# Altium PCB PCB1.PcbDoc
Units mm, origin at the board's own origin, x right, y up, seen from the top; angles counter-clockwise.
Board outline 190 x 137 mm, 2 copper layers (Top Layer, Bottom Layer), stack 1.671 mm thick; 6 components, 4 nets, 17 pads, 0 vias.
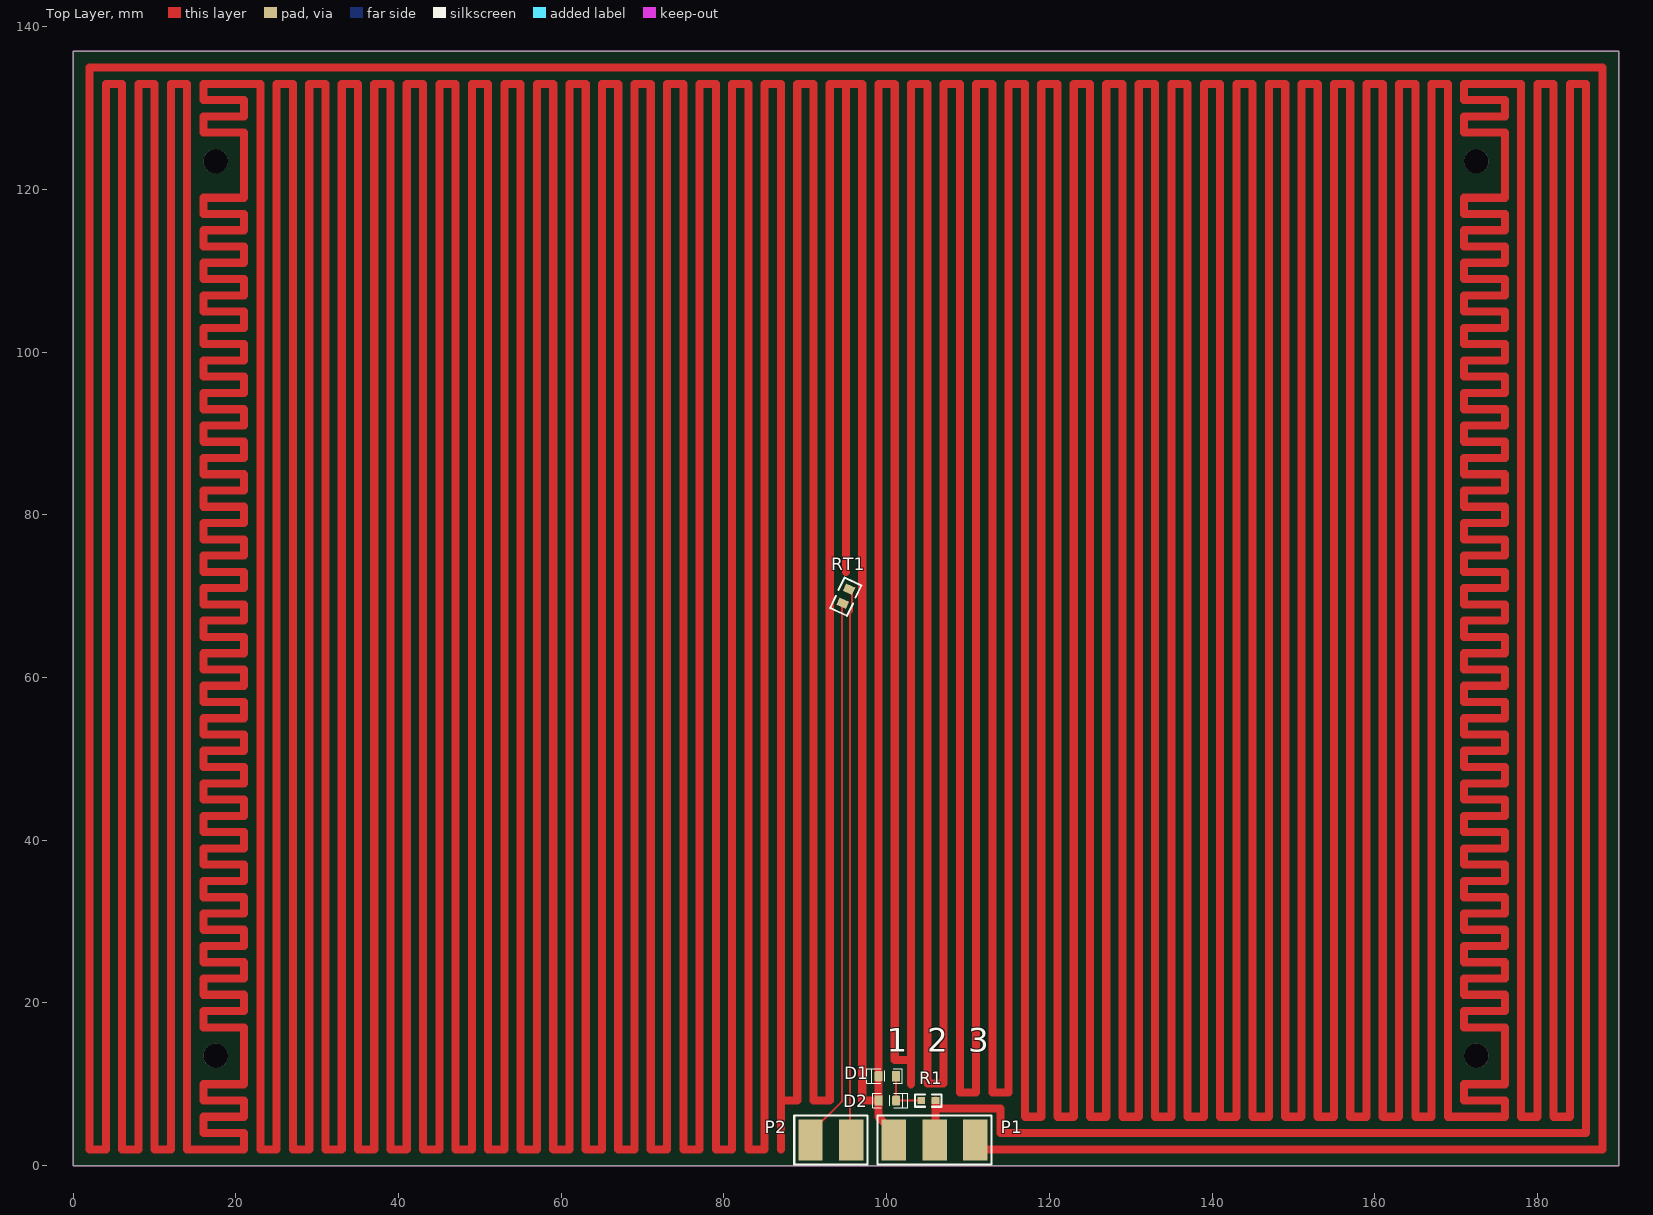
[diagram p0: Top Layer view]
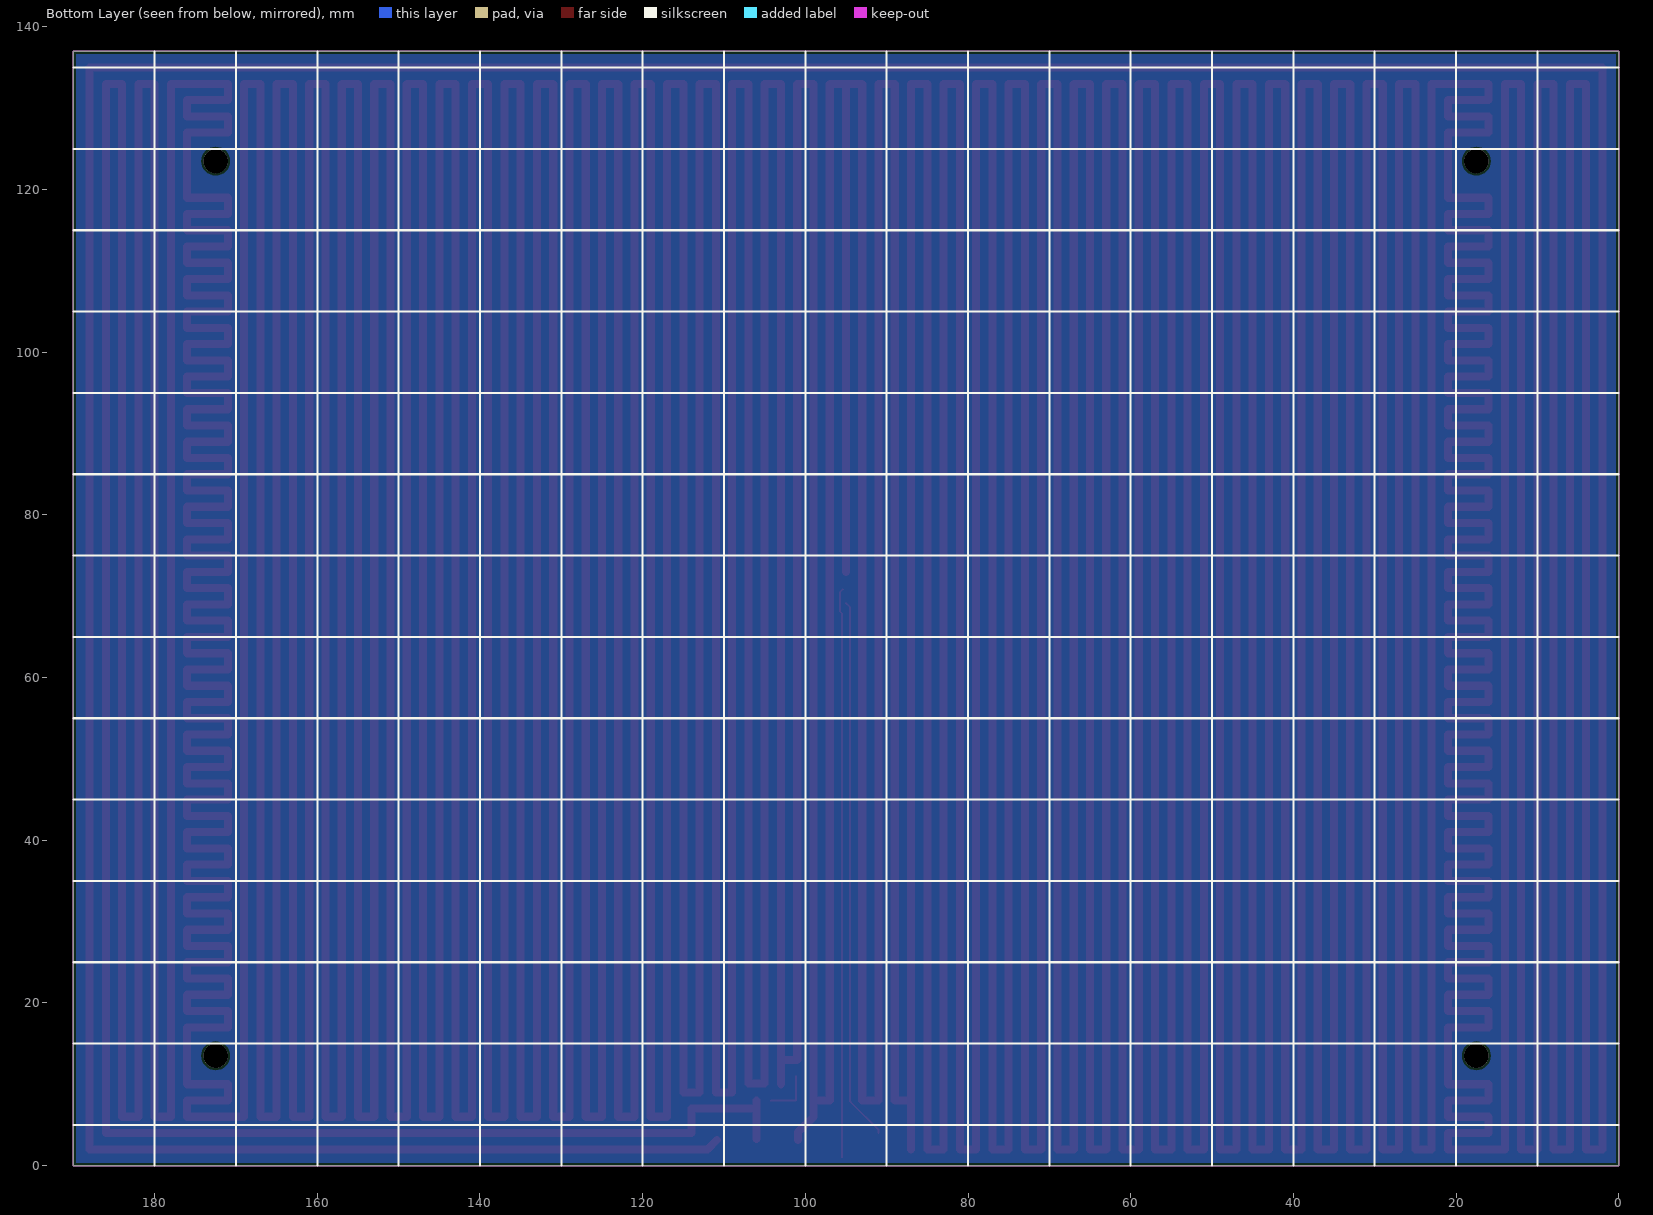
[diagram p1: Bottom Layer view, seen from below]
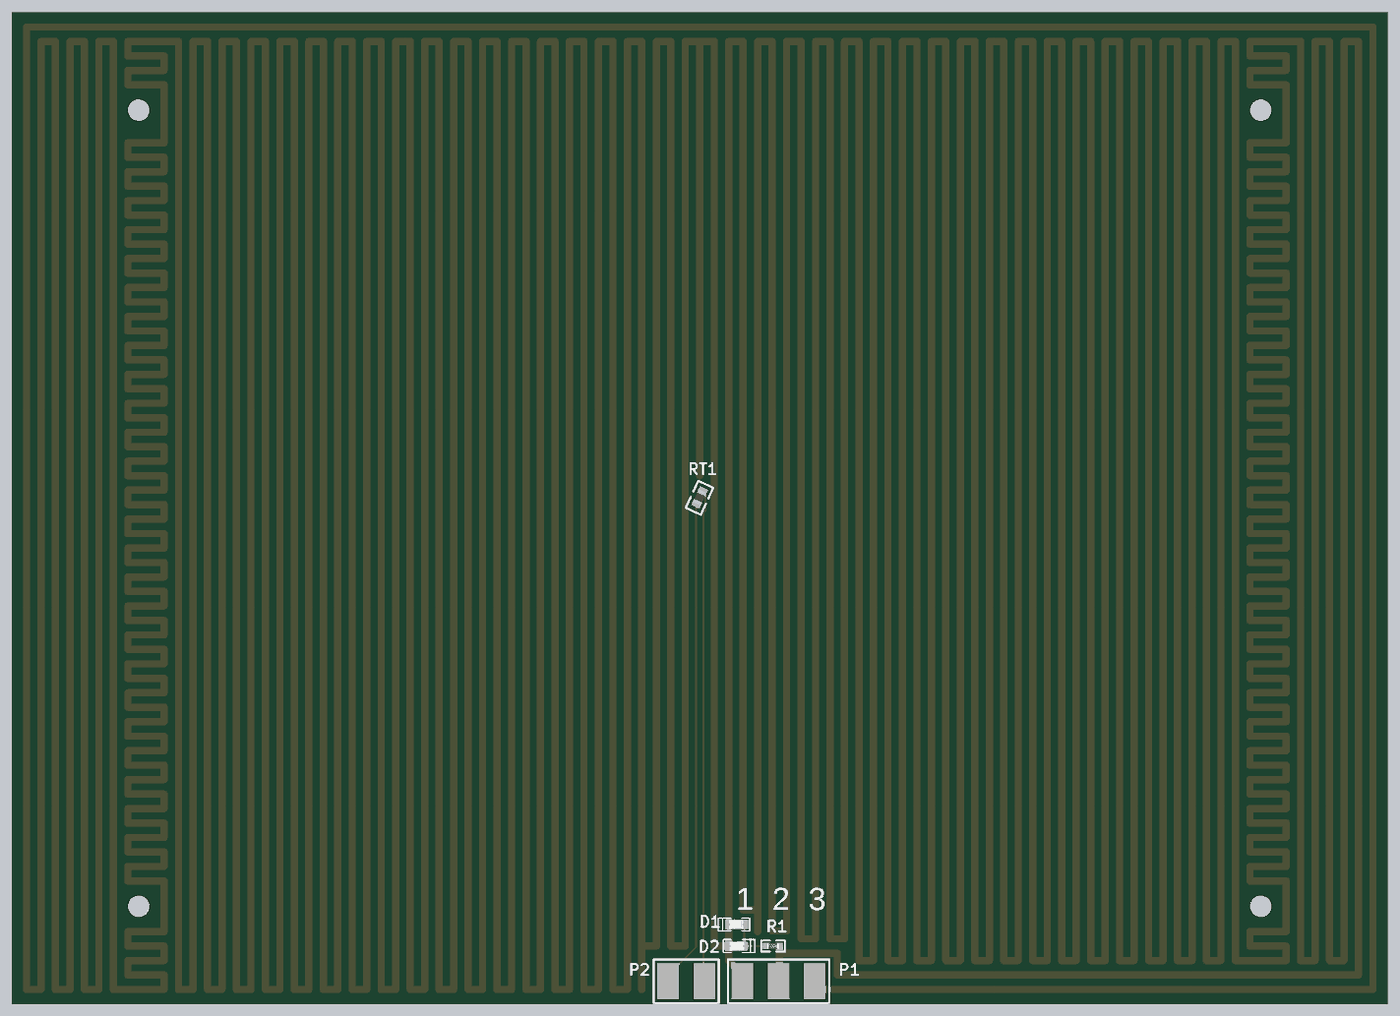
[diagram p2: 3D render of the assembled board from above, using the file's embedded part models]

## Layer stack, top to bottom
Top Layer: signal copper 0.0356
Dielectric: core 1.6, FR-4, Dk 4.8
Bottom Layer: signal copper 0.0356

## Board outline
0,0 190,0 190,137 0,137

## Design rules (kind name [scope] priority, off if disabled: settings)
Clearance [All] p1: gap=0.254
PolygonConnect [All] p1: connectstyle=Relief reliefconductorwidth=0.254 reliefentries=4 polygonreliefangle="90 Angle"
RoutingVias [All] p1: holewidth=0.711 width=1.27 viastyle="Through Hole" minholewidth=0.711 minwidth=1.27 maxholewidth=0.711 maxwidth=1.27
ShortCircuit [All] p1: allowed=TRUE
SilkscreenOverComponentPads [All] p1: minsilkscreentomaskgap=0.254
SolderMaskExpansion [All] p1: expansion=0.102
Width [All] p1: maxlimit=4 minlimit=0.254 preferedwidth=1
26 further rules are at their usual default settings.

## Components (designator, comment, footprint, x,y, rotation, side; value= is the part's Value field where it differs from the comment)
D1 "0805_LED_GREEN" LED0805G 101.159,11 r180 top
D2 "0805_LED_GREEN" LED0805G 99,8 r0 top
P1 "DC_IN" DC_IN 100.892,3.144 r0 top
P2 "TMP" TMP_IN 90.636,3.144 r0 top
R1 "0603_2K_1%" R0603 106,8 r180 top
RT1 "NTC" NTC0805 94.53,69 r65 top

## Footprints (in the part's own frame and the unit in brackets; to place one, negate y for a bottom-side part, rotate by r counter-clockwise, add the part's x,y. Pads: shape width x height; smd on the part's side, far side on the other; paste and mask are expansions set on the pad)
DC_IN [mm]
  rect 3x5 smd: 1(0,0) 2(5,0) 3(10,0)
  silkscreen extent -2,-3 12,3
LED0805G [mil]
  rect 40x50 smd: 1(0,0)
  rrect50% 40x50 smd: 2(85,0)
  silkscreen extent -29,-35 142,35, body extent 5,-25 84,24, height 31
NTC0805 [mm] "NTCG204CH104JT1S"
  rect 1x1.27 smd: 1(0.152,0) 2(2.04,0.005)
  silkscreen extent -1.01,-1.14 3.1,1.15, body extent -0.36,-1.35 2.54,1.36, height 0.91
R0603 [mil] "1/10W"
  rect 38x35 smd: 1(0,0) 2(69,0)
  silkscreen extent -30,-30 99,30, body extent 4,-16 66,16, height 18
TMP_IN [mm]
  rect 3x5 smd: 1(0,0) 2(5,0)
  silkscreen extent -2,-3 7,3

## Part data
D1 D2: library part LED0805
P2: library part TMP_IN
R1: library part R0603, "Resistor"
RT1: library part NTCG204CH104JT1S

## Free pads (board coordinates)
  round 3 hole 3 unplated: 0(17.5,13.5) 0(17.5,123.5) 0(172.5,13.5) 0(172.5,123.5)

## Nets (pads, with @x,y where several pads share a name; then routed paths per layer and width w, separated by ;. In a path a pad name is that pad's centre, name@x,y a point inside that pad or via, vN(x,y) a via of type N, cw(c..) or ccw(c..) an arc to the next point about the centre after c; other vN are vias at no path point)
NetD1_1: D1.1 D2.2 R1.2 | length 6.1
  Top Layer w0.254: D1.1 D2.2 R1.2
NetP2_1: P2.1 RT1.1 | length 66.8
  Top Layer w0.254: P2.1@91,4 91,4.386 94.152,7.538 94.5,7.886 94.5,68.652 RT1.1@95,69.152
NetP2_2: P2.2 RT1.2 | length 70.1
  Top Layer w0.254: RT1.2 95.762,70.476 95.762,68.162 95.5,67.9 P2.2@95.5,1
VCC: D1.2 D2.1 P1.1 P1.2 P1.3 R1.1 | length 12499.8
  Top Layer w1: 87,2 87,8 ; 95,73 95,133 ; P1.1 100.892,4.108 99,6 D2.1 ; 103,10 103,13 ; P1.2@106,3.252 106,7 ; R1.1 106,7 ; P1.3 112.036,2 188,2 188,135 2,135 2,2 4,2 4,133 6,133 6,2 8,2 8,133 10,133 10,2 12,2 12,133 14,133 14,2 21,2 21,4 16,4 16,6 21,6 21,8 16,8 16,10 21,10 21,17 16,17 16,19 21,19 21,21 16,21 16,23 21,23 21,25 16,25 16,27 21,27 21,29 16,29 16,31 21,31 21,33 16,33 16,35 21,35 21,37 16,37 16,39 21,39 21,41 16,41 16,43 21,43 21,45 16,45 16,47 21,47 21,49 16,49 16,51 21,51 21,53 16,53 16,55 21,55 21,57 16,57 16,59 21,59 21,61 16,61 16,63 21,63 21,65 16,65 16,67 21,67 21,69 16,69 16,71 21,71 21,73 16,73 16,75 21,75 21,77 16,77 16,79 21,79 21,81 16,81 16,83 21,83 21,85 16,85 16,87 21,87 21,89 16,89 16,91 21,91 21,93 16,93 16,95 21,95 21,97 16,97 16,99 21,99 21,101 16,101 16,103 21,103 21,105 16,105 16,107 21,107 21,109 16,109 16,111 21,111 21,113 16,113 16,115 21,115 21,117 16,117 16,119 21,119 21,127 16,127 16,129 21,129 21,131 16,131 16,133 23,133 23,2 25,2 25,133 27,133 27,2 29,2 29,133 31,133 31,2 33,2 33,133 35,133 35,2 37,2 37,133 39,133 39,2 41,2 41,133 43,133 43,2 45,2 45,133 47,133 47,2 49,2 49,133 51,133 51,2 53,2 53,133 55,133 55,2 57,2 57,133 59,133 59,2 61,2 61,133 63,133 63,2 65,2 65,133 67,133 67,2 69,2 69,133 71,133 71,2 73,2 73,133 75,133 75,2 77,2 77,133 79,133 79,2 81,2 81,133 83,133 83,2 85,2 85,133 87,133 87,8 ; 87,8 89,8 89,133 91,133 91,8 93,8 93,133 95,133 ; 95,133 97,133 97,8 D2.1 ; D2.1 D1.2 99,133 101,133 101,13 103,13 ; 103,13 103,133 105,133 105,10.1 107,10.1 107,133 109,133 109,9 111,9 111,133 113,133 113,9 115,9 115,133 117,133 117,6 119,6 119,133 121,133 121,6 123,6 123,133 125,133 125,6 127,6 127,133 129,133 129,6 131,6 131,133 133,133 133,6 135,6 135,133 137,133 137,6 139,6 139,133 141,133 141,6 143,6 143,133 145,133 145,6 147,6 147,133 149,133 149,6 151,6 151,133 153,133 153,6 155,6 155,133 157,133 157,6 159,6 159,133 161,133 161,6 163,6 163,133 165,133 165,6 167,6 167,133 169,133 169,6 176,6 176,8 171,8 171,10 176,10 176,17 171,17 171,19 176,19 176,21 171,21 171,23 176,23 176,25 171,25 171,27 176,27 176,29 171,29 171,31 176,31 176,33 171,33 171,35 176,35 176,37 171,37 171,39 176,39 176,41 171,41 171,43 176,43 176,45 171,45 171,47 176,47 176,49 171,49 171,51 176,51 176,53 171,53 171,55 176,55 176,57 171,57 171,59 176,59 176,61 171,61 171,63 176,63 176,65 171,65 171,67 176,67 176,69 171,69 171,71 176,71 176,73 171,73 171,75 176,75 176,77 171,77 171,79 176,79 176,81 171,81 171,83 176,83 176,85 171,85 171,87 176,87 176,89 171,89 171,91 176,91 176,93 171,93 171,95 176,95 176,97 171,97 171,99 176,99 176,101 171,101 171,103 176,103 176,105 171,105 171,107 176,107 176,109 171,109 171,111 176,111 176,113 171,113 171,115 176,115 176,117 171,117 171,119 176,119 176,127 171,127 171,129 176,129 176,131 171,131 171,133 178,133 178,6 180,6 180,133 182,133 182,6 184,6 184,133 186,133 186,4 114,4 114,7 106,7

## Polygon pours and split planes (outlines as drawn)
no net on Bottom Layer "Top Layer-No Net" (solid): 0,0 0,137 190,137 190,0

## Keep-outs
Keep-Out Layer:
  lines w0.2: 0,0 0,137 190,137 190,0 140,0 0,0

## Silkscreen, mask and mechanical layers (free items; w line width, h text height)
Top Overlay:
  text "1" at 100,13 h5
  text "2" at 105,13 h5
  text "3" at 110,13 h5
Bottom Overlay:
  lines w0.254: 0,5 190,5 ; 0,15 190,15 ; 0,25 190,25 ; 0,35 190,35 ; 0,45 190,45 ; 0,55 190,55 ; 0,65 190,65 ; 0,75 190,75 ; 0,85 190,85 ; 0,95 190,95 ; 0,105 190,105 ; 0,115 190,115 ; 0,125 190,125 ; 0,135 190,135 ; 10,0 10,137 ; 20,0 20,137 ; 30,0 30,137 ; 40,0 40,137 ; 50,0 50,137 ; 60,0 60,137 ; 70,0 70,137 ; 80,0 80,137 ; 90,0 90,137 ; 100,0 100,137 ; 110,0 110,137 ; 120,0 120,137 ; 130,0 130,137 ; 140,0 140,137 ; 150,0 150,137 ; 160,0 160,137 ; 170,0 170,137 ; 180,0 180,137